# EAGLE board wifiaudiolink_pcb (EAGLE 9.7.0)
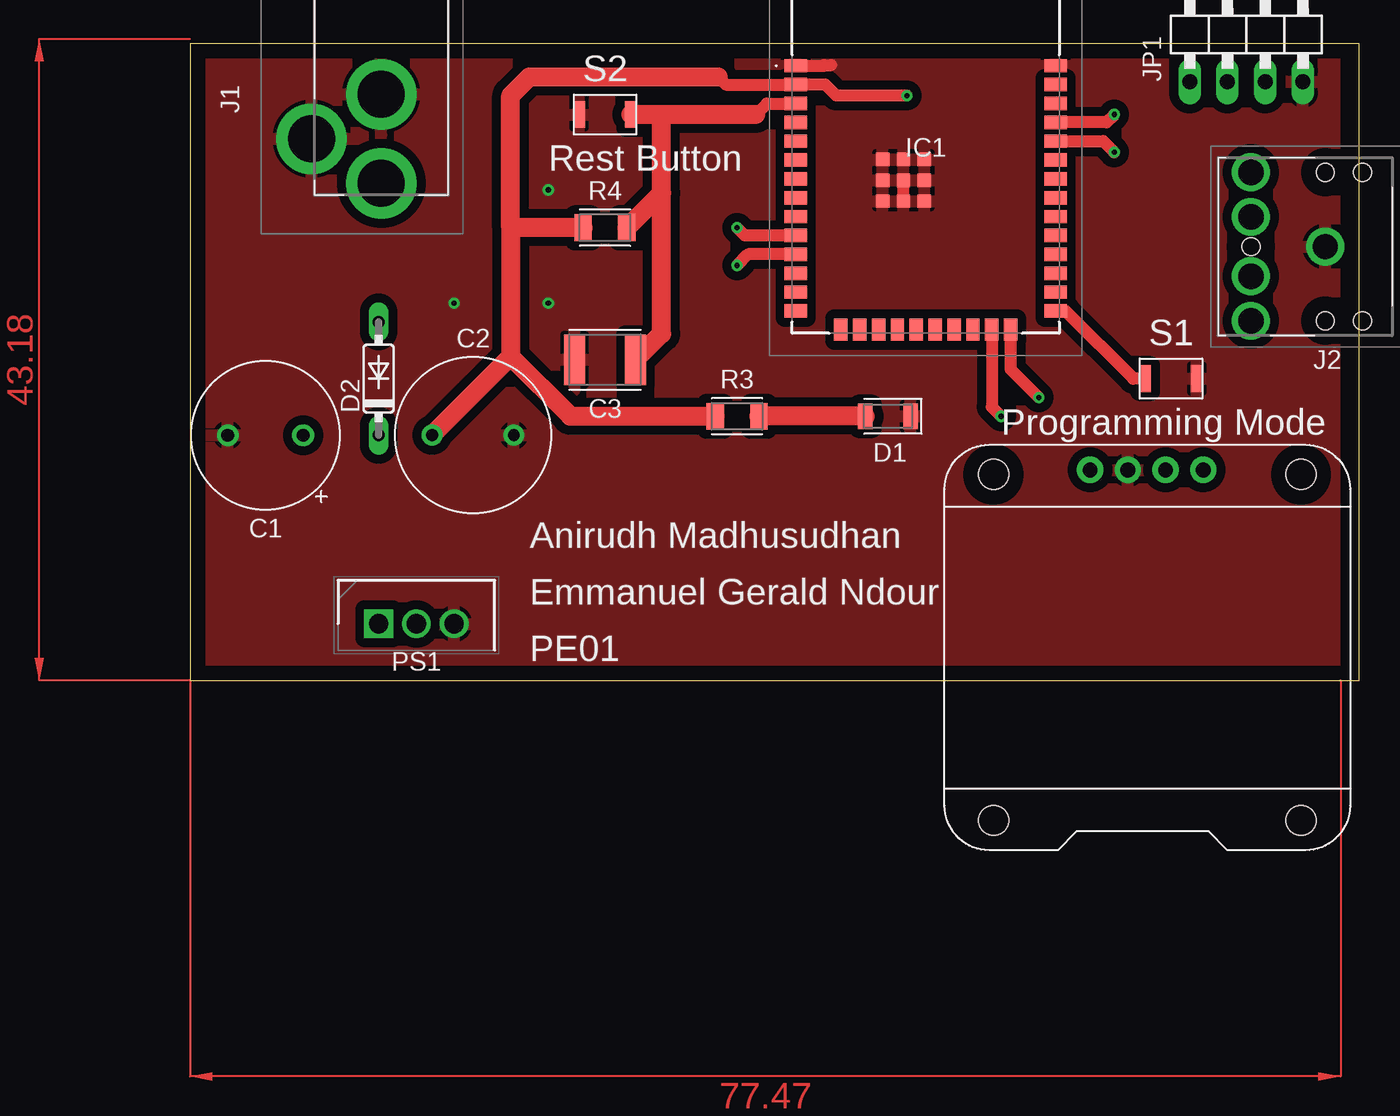
[diagram p0: board, top side]
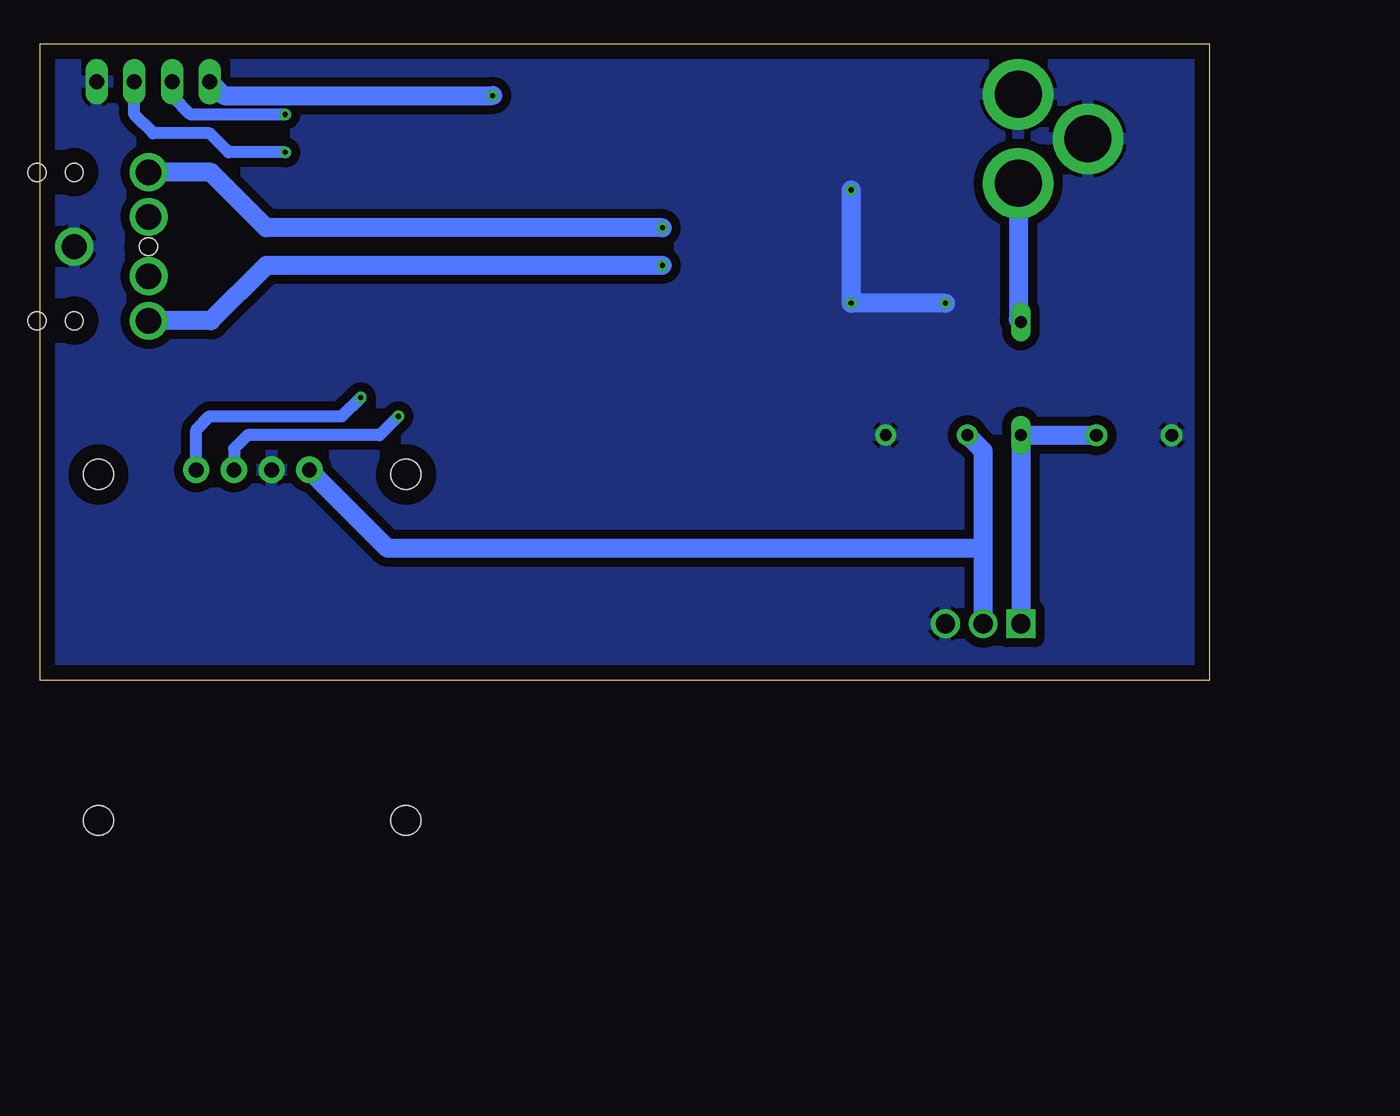
[diagram p1: board, bottom side, seen from below]

Size 78.72 x 42.85 mm. Coordinates in mm from the lower left corner, seen from the top.
Outline: 0,0 78.72,0 78.72,42.85 0,42.85 0,0
Copper layers (1*16): Top 0.035mm / dielectric 1.5mm / Bottom 0.035mm
Design rules "default": minimum track width 6mil, minimum drill 0.35mm, track to track 6mil, track to pad 6mil, pad to pad 6mil, via to via 6mil, smd to smd 6mil, copper to edge 40mil, drill to drill 6mil, minimum pad ring 10mil, minimum via ring 8mil, stop-mask expansion 4mil, vias tented up to drill 0mil, thermal gap 10mil

## Footprints (pad centres in the part's own frame; a part is rotated, then mirrored left to right if it is on the bottom)
CAPPRD508W65D1000H1100B = drill 0.85 pad 1.45: 1 -2.54,0; 2 2.54,0
CAPRD550W60D1025H1250B = drill 0.8 pad 1.4: 1 -2.75,0; 2 2.75,0
CAPC4532X135 = smd 1.397 x 3.415: 1 -2.057,0; 2 2.057,0
LEDC3216X75N_FLAT-R = smd 0.962 x 1.712: A 1.525,0; C -1.525,0
DO35-7 = drill 0.813 long: A 3.81,0; C -3.81,0
ESP32WROOM32EN8 = smd 1.5 x 0.9: 1 -8.75,5.26; 2 -8.75,3.99; 3 -8.75,2.72; 4 -8.75,1.45; 5 -8.75,0.18; 6 -8.75,-1.09; 7 -8.75,-2.36; 8 -8.75,-3.63; 9 -8.75,-4.9; 10 -8.75,-6.17; 11 -8.75,-7.44; 12 -8.75,-8.71; 13 -8.75,-9.98; 14 -8.75,-11.25; 25 8.75,-11.25; 26 8.75,-9.98; 27 8.75,-8.71; 28 8.75,-7.44; 29 8.75,-6.17; 30 8.75,-4.9; 31 8.75,-3.63; 32 8.75,-2.36; 33 8.75,-1.09; 34 8.75,0.18; 35 8.75,1.45; 36 8.75,2.72; 37 8.75,3.99; 38 8.75,5.26 | smd 0.9 x 1.5: 15 -5.715,-12.5; 16 -4.445,-12.5; 17 -3.175,-12.5; 18 -1.905,-12.5; 19 -0.635,-12.5; 20 0.635,-12.5; 21 1.905,-12.5; 22 3.175,-12.5; 23 4.445,-12.5; 24 5.715,-12.5 | smd 0.9 x 0.9: 39 -2.9,-1.06; 40 -2.9,-2.46; 41 -2.9,-3.86; 42 -1.5,-3.86; 43 -0.1,-3.86; 44 -0.1,-2.46; 45 -0.1,-1.06; 46 -1.5,-1.06; 47 -1.5,-2.46
PRT00119 = drill 3.162 pad 4.743: 1 -5.664,-1.286; 2 0.336,-1.286; 3 -2.664,3.414
SJ13523N = drill 1.7 pad 2.55: 1 4.5,0; 2 9.5,-5; 3 9.5,5 | drill 1.7 pad 2.4: 10 9.5,-2; 11 9.5,2 | hole 1.2: 2,5; 4.5,5; 9.5,0; 2,-5; 4.5,-5
1X04/90 = drill 1.016 long: 1 -3.81,-3.81; 2 -1.27,-3.81; 3 1.27,-3.81; 4 3.81,-3.81
TO254P470X1028X1955-3P = drill 1.29 pad 1.935 square: 1 0,0 | drill 1.29 pad 1.935: 2 2.54,0; 3 5.08,0
RESC3216X70 = smd 1.165 x 1.815: 1 -1.475,0; 2 1.475,0
B3U-1000P(M) = smd 0.8 x 1.8: 1 -1.75,0; 2 1.75,0
OLED_0.96_I2C = drill 1 pad 1.778: GND -1.63,11.63; SCL 0.91,11.63; SDA 3.45,11.63; VCC -4.17,11.63 | hole 2: -10.67,-11.97; 10.03,-11.97; 10.03,11.33; -10.67,11.33

## Placement (x,y rotation side)
C1  10µF  [CAPPRD508W65D1000H1100B]  5.08,16.51 180 top
C2  150µF  [CAPRD550W60D1025H1250B]  19.05,16.51 0 top
C3  0.1µF  [CAPC4532X135]  27.94,21.59 180 top
D1  LED_RED  [LEDC3216X75N_FLAT-R]  46.99,17.78 180 top
D2  1N4148DO35-7  [DO35-7]  12.7,20.32 90 top
IC1  ESP32-WROOM-32E-N8  [ESP32WROOM32EN8]  49.53,36.12 0 top
J1  PRT-00119  [PRT00119]  11.59,39.13 90 top
J2  SJ1-3523N  [SJ13523N]  80.93,29.21 180 top
JP1  PINHD-1X4/90  [1X04/90]  71.12,44.12 0 top
PS1  LM1084IT-3.3_NOPB  [TO254P470X1028X1955-3P]  12.7,3.81 0 top
R3  10  [RESC3216X70]  36.83,17.78 0 top
R4  10k  [RESC3216X70]  27.94,30.48 0 top
S1  B3U-1000P(M)  [B3U-1000P(M)]  66.04,20.32 0 top
S2  B3U-1000P(M)  [B3U-1000P(M)]  27.94,38.1 0 top
U$1  OLED_0.96_I2C  [OLED_0.96_I2C]  64.77,2.54 0 top

## Library data of the parts
C1-C3 = Capacitor; CATEGORY: Capacitor
D1 = LED; CATEGORY: LED; COLOR: RED; DESCRIPTION: CHIP LED FLAT; SUB-CATEGORY: CHIP; TYPE: FLAT_TOP
D2 = diode
IC1 = ESP32-WROOM-32E-N8; DESCRIPTION: WiFi Modules - 802.11 SMD Module ESP32-WROOM-32E, ESP32-D0WD-V3, 8 MB SPI flash, PCB antenna; HEIGHT: 3.25mm; MANUFACTURER_NAME: Espressif Systems; MANUFACTURER_PART_NUMBER: ESP32-WROOM-32E-N8; MOUSER_PART_NUMBER: 356-ESP32WRM32E164PH; MOUSER_PRICE-STOCK: https://www.mouser.co.uk/ProductDetail/Espressif-Systems/ESP32-WROOM-32E-N8?qs=Li%252BoUPsLEnsLnZW%252BGLgUhw%3D%3D
J1 = PRT-00119; DESCRIPTION: SparkFun Accessories DC Barrel Power Jack/Connector; HEIGHT: 11mm; MANUFACTURER_NAME: SparkFun; MANUFACTURER_PART_NUMBER: PRT-00119; MOUSER_PART_NUMBER: 474-PRT-00119; MOUSER_PRICE-STOCK: https://www.mouser.co.uk/ProductDetail/SparkFun/PRT-00119?qs=WyAARYrbSnbnQpS9xf%252Bx5A%3D%3D
J2 = SJ1-3523N; DESCRIPTION: Phone Connectors 3.5 MM AUDIO JACK; HEIGHT: 5.5mm; MANUFACTURER_NAME: CUI Devices; MANUFACTURER_PART_NUMBER: SJ1-3523N; MOUSER_PART_NUMBER: 490-SJ1-3523N; MOUSER_PRICE-STOCK: https://www.mouser.co.uk/ProductDetail/CUI-Devices/SJ1-3523N?qs=WyjlAZoYn50aNl0vAhb3Tg%3D%3D
JP1 = Connector; CATEGORY: Headers; DESCRIPTION: Header, Right Angle, 4 Position; MANUFACTURER: Generic; MPN: Generic; OPERATING_TEMPERATURE: Generic; PART_STATUS: Active; PITCH: 0.100" (2.54mm); ROHS_COMPLIANCE: Generic; SERIES: Generic; SUB-CATEGORY: Headers, Male Pins; TYPE: Board to Board or Cable, Unshrouded, Through Hole, Right Angle
PS1 = LM1084IT-3.3_NOPB; DESCRIPTION: Texas Instruments LM1084IT-3.3/NOPB, LDO Voltage Regulator, 5A, 3.3 V, 2.6 27 Vin 3-Pin, TO-220; HEIGHT: 4.7mm; MANUFACTURER_NAME: Texas Instruments; MANUFACTURER_PART_NUMBER: LM1084IT-3.3/NOPB; MOUSER_PART_NUMBER: 926-LM1084IT-3.3NOPB; MOUSER_PRICE-STOCK: https://www.mouser.co.uk/ProductDetail/Texas-Instruments/LM1084IT-3.3-NOPB?qs=X1J7HmVL2ZH4e8i30AZoWw%3D%3D
R3 R4 = Resistor; CATEGORY: Resistor; SUB-CATEGORY: Fixed
S1 S2 = Switch; CATEGORY: SWITCH; DESCRIPTION: Ultra-small Surface-mounting Tactile Switches with High Contact Reliability; MANUFACTURER: OMRON; OPERATING_TEMPERATURE: -25°C to +70°C at 60%RH max; PART_STATUS: ACTIVE; ROHS_COMPLIANCE: RoHS Compliant; SERIES: B3U; TYPE: Tactile
U$1 = tft_1_8_1_44_oled_0_96

## Nets
GND: C1.2 C2.2 C3.2 D1.C IC1.1 IC1.38 IC1.39 IC1.40 IC1.41 IC1.42 IC1.43 IC1.44 IC1.45 IC1.46 IC1.47 J1.2 J1.3 J2.1 JP1.4 PS1.3 S1.2 S2.1 U$1.GND
LEFT: IC1.10 J2.2
N$1: IC1.25 S1.1
N$2: C3.1 IC1.3 R4.2 S2.2
N$4: IC1.34 JP1.3
N$5: IC1.35 JP1.2
N$9: D1.A R3.2
N$11: D2.A J1.1
RIGHT: IC1.11 J2.3
SCL: IC1.23 U$1.SCL
SDA: IC1.24 U$1.SDA
V_SUPPLY: C1.1 D2.C PS1.1
VDD33: C2.1 IC1.2 JP1.1 PS1.2 R3.1 R4.1 U$1.VCC

## Tracks (layer width: path | path; a pad name or v marks a point on that pad's centre or on a via)
GND  (via drill 0.35)
  Top 0.813: IC1.42 IC1.47 | IC1.1 42.65,41.38 42.7,41.43 43.18,41.43
  Bottom 1.27: v17.78,25.4 v24.13,25.4 v24.13,33.02
  pour Bottom (isolate 0.61): 0.41,0.41 78.33,0.41 78.33,42.77 0.41,42.77
  pour Top (isolate 0.61): 0.41,0.41 77.06,0.41 77.06,42.77 0.41,42.77
LEFT  (via drill 0.35)
  Top 0.813: v36.83,30.48 37.36,29.95 IC1.10
  Bottom 1.27: v36.83,30.48 63.5,30.48 67.23,34.21 J2.2
N$1
  Top 0.813: IC1.25 58.95,24.87 63.5,20.32 S1.1
N$2
  Top 0.813: IC1.3 38.84,38.84 38.1,38.1
  Top 1.27: 38.1,38.1 31.75,38.1 | 31.75,38.1 S2.2 | R4.2 31.75,32.82 | 31.75,32.82 31.75,38.1 | C3.1 31.75,23.34 31.75,32.82
N$4  (via drill 0.35)
  Top 0.813: IC1.34 61.49,36.3 v62.23,35.56
  Bottom 0.813: v62.23,35.56 66.04,35.56 67.31,36.83 71.12,36.83 72.39,38.1 JP1.3
N$5  (via drill 0.35)
  Top 0.813: IC1.35 61.7,37.57 v62.23,38.1
  Bottom 0.813: v62.23,38.1 68.58,38.1 69.85,39.37 JP1.2
N$9
  Top 1.27: D1.A R3.2
N$11
  Bottom 1.27: J1.1 12.88,24.31 D2.A
RIGHT  (via drill 0.35)
  Top 0.813: v36.83,27.94 37.57,28.68 IC1.11
  Bottom 1.27: v36.83,27.94 63.5,27.94 67.23,24.21 J2.3
SCL  (via drill 0.35)
  Top 0.813: IC1.23 53.98,18.41 v54.61,17.78
  Bottom 0.813: v54.61,17.78 55.88,16.51 64.77,16.51 65.68,15.6 U$1.SCL
SDA  (via drill 0.35)
  Top 0.813: IC1.24 55.24,20.96 v57.15,19.05
  Bottom 0.813: U$1.SDA 68.22,16.87 67.31,17.78 58.42,17.78 v57.15,19.05
V_SUPPLY
  Bottom 1.27: PS1.1 D2.C C1.1
VDD33  (via drill 0.35)
  Top 0.813: 35.56,40.64 36.09,40.11 IC1.2 41.91,40.11 42.05,40.11 42.77,40.11 43.51,39.37 v48.26,39.37
  Top 1.27: C2.1 21.59,21.8 | 21.59,30.48 21.59,21.8 | R4.1 21.59,30.48 | 21.59,30.48 21.59,39.37 22.86,40.64 35.56,40.64 | 21.59,21.8 25.61,17.78 R3.1
  Bottom 1.27: PS1.2 15.24,8.89 | 15.24,8.89 15.24,15.45 C2.1 | U$1.VCC 55.32,8.89 15.24,8.89 | v48.26,39.37 66.37,39.37 JP1.1
(copper drawn outside any net)
  shapes: Top area x2

## Text on the board
tNames: Rest Button | Programming Mode | Anirudh Madhusudhan | Emmanuel Gerald Ndour | PE01